# Altium PCB PriterPCB.PcbDoc
Units mm, origin at the board's own origin, x right, y up, seen from the top; angles counter-clockwise.
Board outline 149.73 x 79.12 mm, 2 copper layers (Top Layer, Bottom Layer); 63 components, 65 nets, 263 pads, 10 vias.
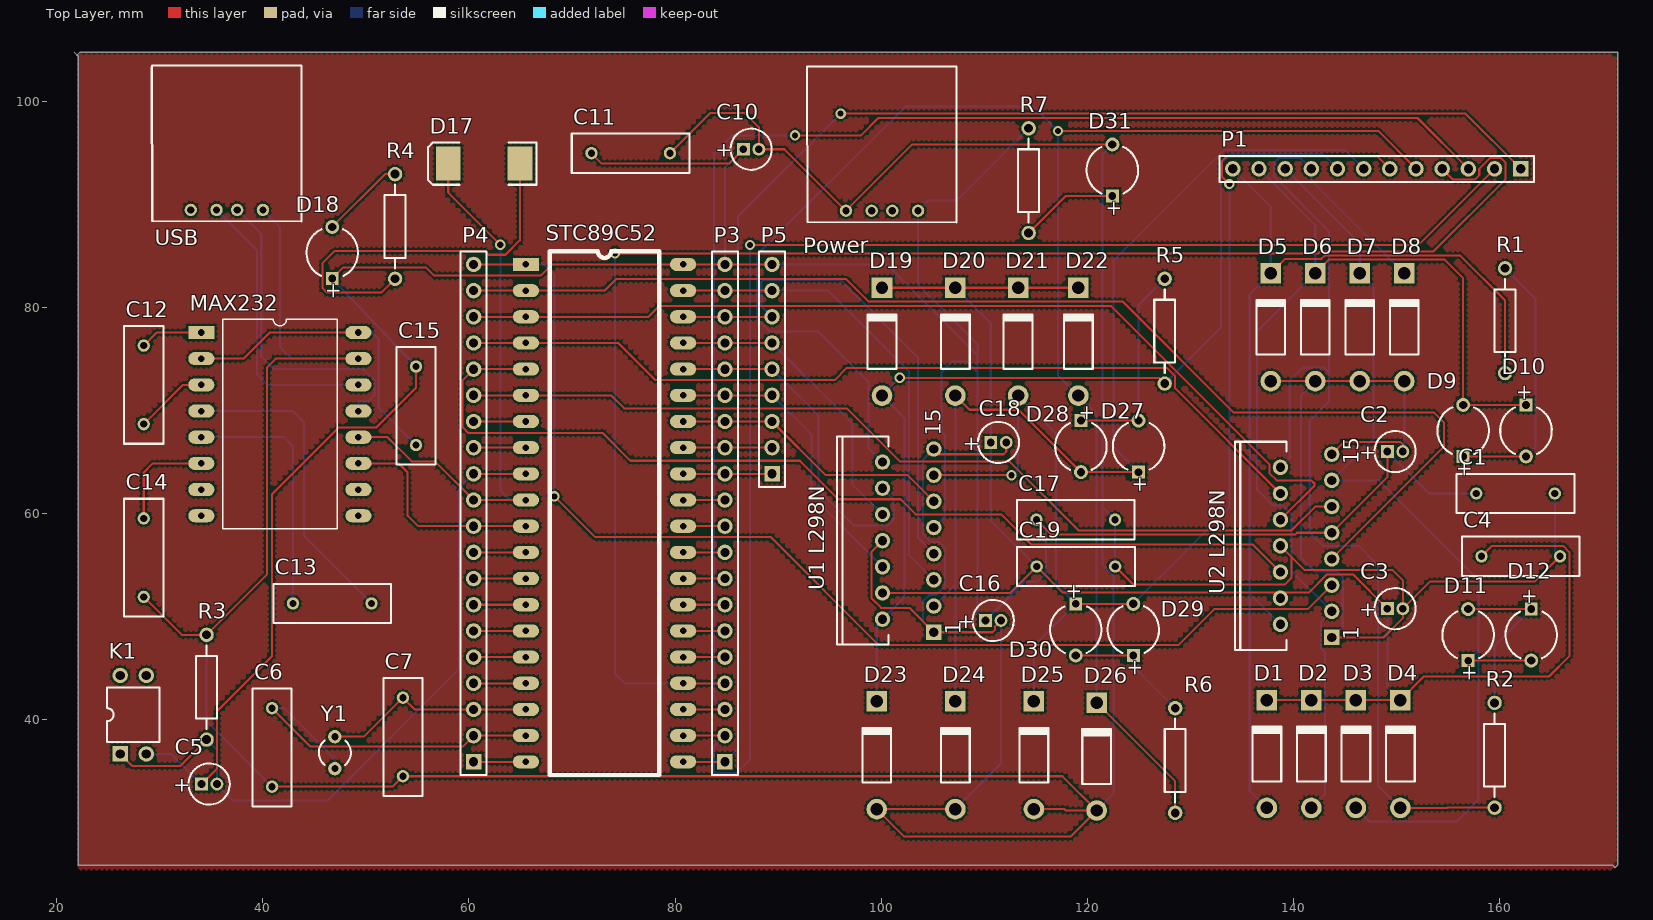
[diagram p0: Top Layer view]
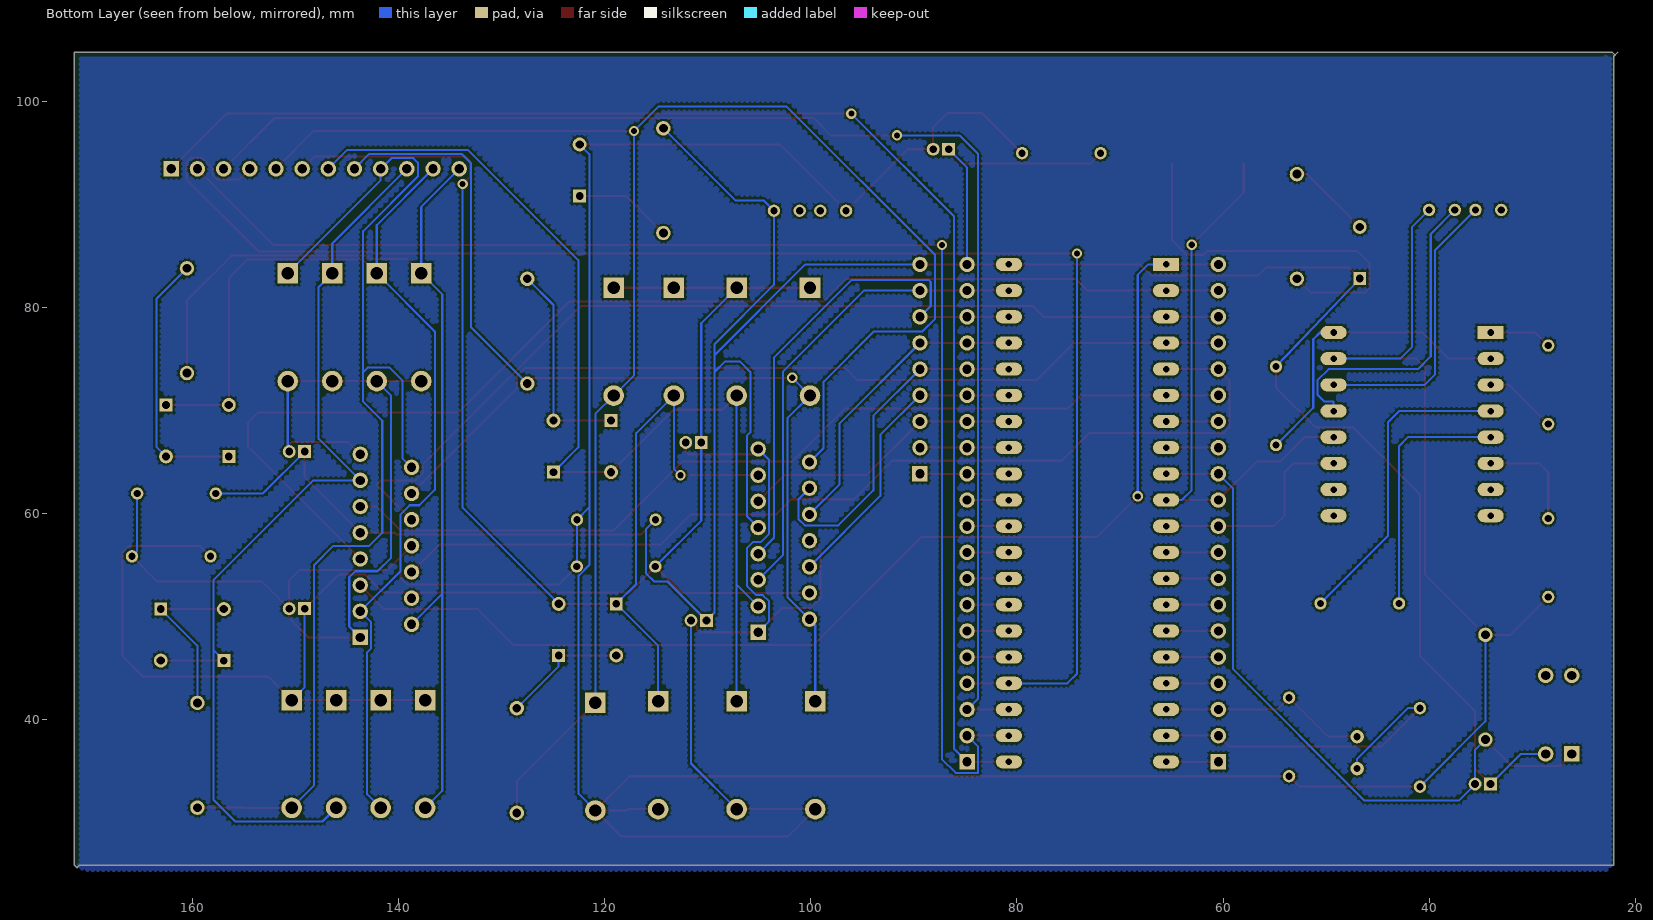
[diagram p1: Bottom Layer view, seen from below]

## Layer stack, top to bottom
Top Layer: signal copper 0.0356
Dielectric: dielectric 0.32, FR-4, Dk 4.8
Bottom Layer: signal copper 0.0356

## Board outline
21.971,104.521 22.225,104.775 171.45,104.775 171.45,25.908 171.196,25.654 170.942,25.908 22.098,25.908 22.098,104.394 21.717,104.775

## Design rules (kind name [scope] priority, off if disabled: settings)
Clearance [All] p1: gap=0.2
ComponentClearance ComponentClearance_1 [All] p2: gap=0.254 collisioncheckmode=3 verticalgap=0.254 showdistances=FALSE
DiffPairsRouting DiffPairsRouting_1 [All] p2: maxlimit=0.254 minlimit=0.254 mostfreqgap=0.254 maxuncoupledlength=12.7
FabricationTestPointUsage TestPointUsage [All] p1: valid=0 allowmultiple=FALSE
FabricationTestPointUsage TestPointUsage_1 [All] p2: valid=0 allowmultiple=FALSE
FabricationTestpoint Testpoint [All] p1: side=3 testpointundercomponent=TRUE minsize=1.016 maxsize=2.54 preferedsize=1.524 minholesize=0 maxholesize=1.016 preferedholesize=0.813 testpointgrid=0.025 allowsidetop=TRUE allowsidebottom=TRUE usegrid=TRUE gridtolerance=0
FabricationTestpoint Testpoint_1 [All] p2: side=3 testpointundercomponent=TRUE minsize=1.016 maxsize=2.54 preferedsize=1.524 minholesize=0 maxholesize=1.016 preferedholesize=0.813 testpointgrid=0.025 allowsidetop=TRUE allowsidebottom=TRUE usegrid=TRUE gridtolerance=0
FanoutControl Fanout_LCC [IsLCC] p1: bgadir=Out bgaviamode=Centered fanoutstyle=Auto fanoutdirection=Alternating viagrid=0.025 // Fanout_LCC (Default Rule)
FanoutControl Fanout_BGA [IsBGA] p2: bgadir=Out bgaviamode=Centered fanoutstyle=Auto fanoutdirection=Alternating viagrid=0.025 // Fanout_BGA (Default Rule)
FanoutControl Fanout_Default [All] p4: bgadir=Out bgaviamode=Centered fanoutstyle=Auto fanoutdirection=Alternating viagrid=0.025 // Fanout_Default (Default Rule)
FanoutControl Fanout_Small [(CompPinCount < 5)] p5: bgadir=Out bgaviamode=Centered fanoutstyle=Auto fanoutdirection=OutThenIn viagrid=0.025 // Fanout_Small (Default Rule)
FanoutControl Fanout_BGA_1 [IsBGA] p6: bgadir=Out bgaviamode=Centered fanoutstyle=Auto fanoutdirection=Alternating viagrid=0.025 // Fanout_BGA (Default Rule)
FanoutControl Fanout_LCC_1 [IsLCC] p7: bgadir=Out bgaviamode=Centered fanoutstyle=Auto fanoutdirection=Alternating viagrid=0.025 // Fanout_LCC (Default Rule)
FanoutControl Fanout_SOIC_1 [IsSOIC] p8: bgadir=Out bgaviamode=Centered fanoutstyle=Auto fanoutdirection=Alternating viagrid=0.025 // Fanout_SOIC (Default Rule)
FanoutControl Fanout_Small_1 [(CompPinCount < 5)] p9: bgadir=Out bgaviamode=Centered fanoutstyle=Auto fanoutdirection=OutThenIn viagrid=0.025 // Fanout_Small (Default Rule)
FanoutControl Fanout_Default_1 [All] p10: bgadir=Out bgaviamode=Centered fanoutstyle=Auto fanoutdirection=Alternating viagrid=0.025 // Fanout_Default (Default Rule)
Height Height_1 [All] p2: minheight=0 maxheight=25.4 prefheight=12.7
HoleSize HoleSize_1 [All] p2: absolutevalues=TRUE maxlimit=2.54 minlimit=0.025 maxpercent=80.000 minpercent=20.000
LayerPairs LayerPairs_1 [All] p2: enforce=TRUE
PasteMaskExpansion PasteMaskExpansion_1 [All] p2: expansion=0
PlaneClearance PlaneClearance_1 [All] p2: clearance=0.508
PolygonConnect [All] p1: connectstyle=Relief reliefconductorwidth=0.254 reliefentries=4 polygonreliefangle="90 Angle"
PolygonConnect PolygonConnect_1 [All] p2: connectstyle=Relief reliefconductorwidth=0.254 reliefentries=4 polygonreliefangle="90 Angle"
RoomDefinition [InComponentClass('点阵打印机')] p1: confinementstyle=ConfineIn formatcopy=TRUE lockcomponents=FALSE outline 22.225,25.654 171.196,25.654 171.196,104.394 22.225,104.394
RoutingPriority RoutingPriority_1 [All] p2: routingpriority=0
RoutingTopology RoutingTopology_1 [All] p2: topology=Shortest
RoutingVias [All] p1: holewidth=0.6 width=1 viastyle="Through Hole" minholewidth=0.711 minwidth=1.27 maxholewidth=0.711 maxwidth=1.27
SMDNeckDown [All] p1: percent=50.000
ShortCircuit ShortCircuit_1 [All] p2: allowed=FALSE
SilkscreenOverComponentPads SilkToSolderMaskClearance [IsPad] p1: minsilkscreentomaskgap=0.254
SolderMaskExpansion [All] p1: expansion=0.102
SolderMaskExpansion SolderMaskExpansion_1 [All] p2: expansion=0.102
UnRoutedNet UnRoutedNet_1 [All] p2:
Width [All] p1: maxlimit=0.2 minlimit=0.2 preferedwidth=0.2
21 further rules are at their usual default settings.

## Components (designator, comment, footprint, x,y, rotation, side; value= is the part's Value field where it differs from the comment)
C1 "Cap" RAD-0.3 161.544,61.976 r180 top
C2 "Cap Pol1" A 149.86,66.04 r0 top
C3 "Cap Pol1" A 149.86,50.8 r0 top
C4 "Cap" RAD-0.3 162.052,55.88 r180 top
C5 "Cap Pol1" A 34.798,33.782 r0 top
C6 "Cap" RAD-0.3 40.894,37.338 r90 top
C7 "Cap" RAD-0.3 53.594,38.354 r90 top
C10 "Cap Pol1" A 87.376,95.377 r0 top
C11 "Cap" RAD-0.3 75.692,94.996 r180 top
C12 "Cap" RAD-0.3 28.448,72.517 r90 top
C13 "Cap" RAD-0.3 46.736,51.308 r180 top
C14 "Cap" RAD-0.3 28.448,55.753 r90 top
C15 "Cap" RAD-0.3 54.864,70.485 r90 top
C16 "Cap Pol1" A 110.871,49.657 r0 top
C17 "Cap" RAD-0.3 118.872,59.436 r180 top
C18 "Cap Pol1" A 111.379,66.929 r0 top
C19 "Cap" RAD-0.3 118.893,54.894 r180 top
D1 "1N4007" DO-41 137.414,36.703 r90 top
D2 "1N4007" DO-41 141.732,36.703 r90 top
D3 "1N4007" DO-41 146.05,36.703 r90 top
D4 "1N4007" DO-41 150.368,36.703 r90 top
D5 "1N4007" DO-41 137.795,78.105 r90 top
D6 "1N4007" DO-41 142.113,78.105 r90 top
D7 "1N4007" DO-41 146.431,78.105 r90 top
D8 "1N4007" DO-41 150.749,78.105 r90 top
D9 "LED0" CAPPR5-5x5 156.464,68.072 r90 top
D10 "LED0" CAPPR5-5x5 162.56,68.072 r270 top
D11 "LED0" CAPPR5-5x5 156.947,48.26 r90 top
D12 "LED0" CAPPR5-5x5 163.068,48.26 r270 top
D17 "SS14" SMC 61.468,93.98 r180 top
D18 "LED0" CAPPR5-5x5 46.736,85.344 r90 top
D19 "1N4007" DO-41 100.076,76.708 r90 top
D20 "1N4007" DO-41 107.188,76.708 r90 top
D21 "1N4007" DO-41 113.284,76.708 r90 top
D22 "1N4007" DO-41 119.126,76.708 r90 top
D23 "1N4007" DO-41 99.568,36.576 r90 top
D24 "1N4007" DO-41 107.188,36.576 r90 top
D25 "1N4007" DO-41 114.808,36.576 r90 top
D26 "1N4007" DO-41 120.904,36.449 r90 top
D27 "LED0" CAPPR5-5x5 124.968,66.548 r90 top
D28 "LED0" CAPPR5-5x5 119.38,66.548 r270 top
D29 "LED0" CAPPR5-5x5 124.46,48.768 r90 top
D30 "LED0" CAPPR5-5x5 118.872,48.768 r270 top
D31 "LED0" CAPPR5-5x5 122.428,93.345 r90 top
K1 "SW-PB" DIP-4 27.432,40.513 r0 top (schematic designator S1)
MAX232 "MAX232CPE" MAX232CPE 34.036,77.597 r0 top (schematic designator U4)
P1 "Header 12" HDR1X12 162.052,93.472 r180 top
P3 "Header 20" HDR1X20 84.836,35.941 r90 top
P4 "Header 20" HDR1X20 60.452,35.941 r90 top
P5 "10k" HDR1X9 89.408,63.881 r90 top
Power "USBPower" USB 100.076,89.408 r0 top (schematic designator P9)
R1 "Res2" AXIAL-0.4 160.528,78.74 r90 top
R2 "Res2" AXIAL-0.4 159.512,36.576 r90 top
R3 "Res2" AXIAL-0.4 34.544,43.18 r90 top
R4 "Res2" AXIAL-0.4 52.832,87.884 r90 top
R5 "Res2" AXIAL-0.4 127.508,77.724 r90 top
R6 "Res2" AXIAL-0.4 128.524,36.068 r90 top
R7 "Res2" AXIAL-0.4 114.3,92.329 r90 top
STC89C52 "STC89C52" STC89C52 65.532,84.201 r0 top (schematic designator U1)
"U1 L298N" "L298N" MULTIWATT15VA 102.616,57.404 r90 top (schematic designator U3)
"U2 L298N" "L298N" MULTIWATT15VA 141.224,56.896 r90 top (schematic designator U2)
USB "USB" USB 36.51,89.49 r0 top (schematic designator P6)
Y1 "XTAL" R38 46.99,36.83 r0 top

## Footprints (in the part's own frame and the unit in brackets; to place one, negate y for a bottom-side part, rotate by r counter-clockwise, add the part's x,y. Pads: shape width x height; smd on the part's side, far side on the other; paste and mask are expansions set on the pad)
A [mm] "Capacitor, Electrolytic, Radial; Body 4 x 5 mm (Dia.xH typ); Pin Spacing 1.5 mm (typ)"
  rect 1.25x1.25 hole 0.75: 1(-0.75,0)
  round 1.25 hole 0.75: 2(0.75,0)
  silkscreen extent -2,-2 2,2
AXIAL-0.4 [mm] "Resistor; 2 Leads"
  round 1.4 hole 0.85: 1(-5.08,0) 2(5.08,0)
  silkscreen extent -4.06,-1.02 4.06,1.02
CAPPR5-5x5 [mm] "Capacitor, Electrolytic, Radial; Body 5 x 5 mm (Dia.xH typ); Pin Spacing 5 mm (typ)"
  rect 1.25x1.25 hole 0.75: 1(-2.5,0)
  round 1.35 hole 0.8: 2(2.5,0)
  silkscreen extent -2.26,-2.5 2.27,2.5
DIP-4 [mm] "DIP; 4 Leads; Row Spacing 7.62 mm; Pitch 2.54 mm"
  rect 1.5x1.5 hole 0.9: 1(-1.27,-3.81)
  round 1.5 hole 0.9: 2(1.27,-3.81) 3(1.27,3.81) 4(-1.27,3.81)
  silkscreen extent -2.55,-2.65 2.55,2.65
DO-41 [mm] "Diode, Axial; Body 5.2 x 2.7 mm (LxDia. max), Lead Dia. 0.86 mm (max)"
  round 2 hole 1.2: 1(-5.23,0)
  rect 2x2 hole 1.2: 2(5.23,0)
  silkscreen extent -2.65,-1.42 2.75,1.4
HDR1X9 [mm] "Connector; Header; 9 Position"
  rect 1.5x1.5 hole 0.9: 1(0,0)
  round 1.5 hole 0.9: 2(2.54,0) 3(5.08,0) 4(7.62,0) 5(10.16,0) 6(12.7,0) 7(15.24,0) 8(17.78,0) 9(20.32,0)
  silkscreen extent -1.27,-1.27 21.59,1.27
HDR1X12 [mm] "Connector; Header; 12 Position"
  rect 1.5x1.5 hole 0.9: 1(0,0)
  round 1.5 hole 0.9: 2(2.54,0) 3(5.08,0) 4(7.62,0) 5(10.16,0) 6(12.7,0) 7(15.24,0) 8(17.78,0) 9(20.32,0) 10(22.86,0) 11(25.4,0) 12(27.94,0)
  silkscreen extent -1.27,-1.27 29.21,1.27
HDR1X20 [mm] "Connector; Header; 20 Position"
  rect 1.5x1.5 hole 0.9: 1(0,0)
  round 1.5 hole 0.9: 2(2.54,0) 3(5.08,0) 4(7.62,0) 5(10.16,0) 6(12.7,0) 7(15.24,0) 8(17.78,0) 9(20.32,0) 10(22.86,0) 11(25.4,0) 12(27.94,0) 13(30.48,0) 14(33.02,0) 15(35.56,0) 16(38.1,0) 17(40.64,0) 18(43.18,0) 19(45.72,0) 20(48.26,0)
  silkscreen extent -1.27,-1.27 49.53,1.27
MAX232CPE [mm]
  rect 2.54x1.27 hole 0.635: 1(0,0)
  oval 2.54x1.27 hole 0.635: 2(0,-2.54) 3(0,-5.08) 4(0,-7.62) 5(0,-10.16) 6(0,-12.7) 7(0,-15.24) 8(0,-17.78) 9(15.24,-17.78) 10(15.24,-15.24) 11(15.24,-12.7) 12(15.24,-10.16) 13(15.24,-7.62) 14(15.24,-5.08) 15(15.24,-2.54) 16(15.24,0)
  silkscreen extent 2.06,-19.05 13.18,1.27
MULTIWATT15VA [mm] "TO, Thru-Hole, Vertical, Heatsink Mounted; 15 Bent Staggered Leads; Pitch 1.27 mm"
  rect 1.5x1.5 hole 0.9: 1(-8.89,-2.49)
  round 1.5 hole 0.9: 2(-7.62,2.49) 3(-6.35,-2.49) 4(-5.08,2.49) 5(-3.81,-2.49) 6(-2.54,2.49) 7(-1.27,-2.49) 8(0,2.49) 9(1.27,-2.49) 10(2.54,2.49) 11(3.81,-2.49) 12(5.08,2.49) 13(6.35,-2.49) 14(7.62,2.49) 15(8.89,-2.49)
  silkscreen extent -10.1,1.89 10.1,6.89
R38 [mm] "Crystal, Thru-Hole; 2 Leads; Body 3.1 x 8.2 mm (Dia.xH)"
  round 1.3 hole 0.7: 1(0,1.55) 2(0,-1.55)
  silkscreen extent -1.55,-1.19 1.55,1.17
RAD-0.3 [mm] "Capacitor; 2 Leads"
  round 1.2 hole 0.7: 1(-3.81,0) 2(3.81,0)
  silkscreen extent -5.71,-1.91 5.71,1.91
SMC [mm] "DO-214-AB/SMC; 2 C-Bend Leads; Body 7.9 x 5.9 mm, inc. leads (LxW)"
  rect 2.4x3.3 smd: 1(-3.475,0) 2(3.475,0)
  silkscreen extent -5.08,-2.05 5.42,2.06
STC89C52 [mm]
  rect 2.54x1.27 hole 0.635: 1(0,0)
  oval 2.54x1.27 hole 0.635: 2(0,-2.54) 3(0,-5.08) 4(0,-7.62) 5(0,-10.16) 6(0,-12.7) 7(0,-15.24) 8(0,-17.78) 9(0,-20.32) 10(0,-22.86) 11(0,-25.4) 12(0,-27.94) 13(0,-30.48) 14(0,-33.02) 15(0,-35.56) 16(0,-38.1) 17(0,-40.64) 18(0,-43.18) 19(0,-45.72) 20(0,-48.26) 21(15.24,-48.26) 22(15.24,-45.72) 23(15.24,-43.18) 24(15.24,-40.64) 25(15.24,-38.1) 26(15.24,-35.56) 27(15.24,-33.02) 28(15.24,-30.48) 29(15.24,-27.94) 30(15.24,-25.4) 31(15.24,-22.86) 32(15.24,-20.32) 33(15.24,-17.78) 34(15.24,-15.24) 35(15.24,-12.7) 36(15.24,-10.16) 37(15.24,-7.62) 38(15.24,-5.08) 39(15.24,-2.54) 40(15.24,0)
  silkscreen extent 2.31,-49.53 12.93,1.27
USB [mm]
  round 1.2 hole 0.7: 1(-3.5,0) 2(-1,0) 3(1,0) 4(3.5,0)
  silkscreen extent -7.28,-1.14 7.25,14

## Part data
C1 C4 C6 C7 C11 C12 C13 C14 C15 C17 C19: "Capacitor"
C2 C3 C5 C10 C16 C18: "Polarized Capacitor (Radial)"
D1 D2 D3 D4 D5 D6 D7 D8 D19 D20 D21 D22 D23 D24 D25 D26: library part "Diode 1N4007", "1 Amp General Purpose Rectifier"
D9 D10 D11 D12 D18 D27 D28 D29 D30 D31: "Typical INFRARED GaAs LED"
D17: library part Diode, "Default Diode"
K1: "Switch"
P1: library part "Header 2", "Header, 2-Pin"
P3 P4: "Header, 20-Pin"
P5: library part "Header 9", "Header, 9-Pin"
Power USB: library part "Header 4", "Header, 4-Pin"
R1 R2 R3 R4 R5 R6 R7: "Resistor"
"U1 L298N" "U2 L298N": "High-Current Switching Regulator"
Y1: "Crystal Oscillator"

## Via types
v1: diameter 1, hole 0.6, Top Layer to Bottom Layer, 10 vias

## Nets (pads, with @x,y where several pads share a name; then routed paths per layer and width w, separated by ;. In a path a pad name is that pad's centre, name@x,y a point inside that pad or via, vN(x,y) a via of type N, cw(c..) or ccw(c..) an arc to the next point about the centre after c; other vN are vias at no path point)
+5V: "U1 L298N.9" "U2 L298N.9" C1.2 C2.1 C5.1 C10.1 C11.2 C15.2 C16.1 C17.2 D18.1 K1.2 P3.20 P5.9 Power.4 R7.2 STC89C52.40 | length 304.4
  Top Layer w0.2: C5.1 35.56,35.294 35.56,40.869 40.894,46.203 40.894,61.9 47.371,68.377 51.003,68.377 54.864,72.238 C15.2 ; D18.1 47.814,83.922 55.804,83.922 56.617,83.109 66.98,83.109 68.072,84.201 STC89C52.40 P3.20 P5.9 ; C11.2 72.898,93.98 85.229,93.98 C10.1 ; C17.2 116.512,57.986 140.184,57.986 140.364,58.166 143.714,58.166 149.11,63.562 C2.1
  Bottom Layer w0.2: K1.2 31.127,36.703 C5.1 ; D18.1 46.736,82.804 C15.2 ; P3.20 84.836,93.587 C10.1 ; P5.9 100.533,84.201 109.347,75.387 ; 105.106,58.674 106.172,59.74 106.172,67.615 105.867,67.92 105.867,73.762 106.909,74.803 108.306,74.803 109.347,73.762 ; R7.2 107.315,90.424 104.592,90.424 Power.4 103.576,82.225 109.347,76.454 109.347,75.387 ; C17.2 116.002,58.496 116.002,54.254 115.189,53.442 113.906,53.442 C16.1 109.347,50.431 109.347,73.762 ; C2.1 153.174,61.976 C1.2 ; 109.347,73.762 109.347,75.387
ENA_1: "U2 L298N.6" P4.16 STC89C52.5 | length 96.3
  Top Layer w0.2: STC89C52.5 P4.16 59.385,72.974 59.385,68.402 59.944,67.843 72.974,67.843 75.667,65.151 92.1,65.151 95.834,61.417 101.879,61.417 103.353,59.944 111.633,59.944 114.554,57.023 136.067,57.023 138.734,54.356
ENB_1: "U2 L298N.11" P4.15 STC89C52.6 | length 89.7
  Top Layer w0.2: P4.15 STC89C52.6 73.787,71.501 75.057,70.231 96.672,70.231 101.829,65.075 112.471,65.075 119.16,58.386 139.776,58.386 142.096,60.706 143.714,60.706
GND: "U1 L298N.1" "U1 L298N.8" "U1 L298N.15" "U2 L298N.1" "U2 L298N.8" "U2 L298N.15" C1.1 C2.2 C3.2 C4.1 C6.1 C7.1 C10.2 C11.1 C14.1 C16.2 C17.1 C18.2 C19.1 D5.1 D6.1 D7.1 D8.1 D23.1 D24.1 D25.1 D26.1 D31.2 MAX232.15 Power.1 R3.2 USB.4 | length 525
  Top Layer w0.2: C14.1 32.131,48.26 R3.2 40.411,54.127 40.411,74.219 41.25,75.057 MAX232.15 ; C6.1 52.578,33.528 C7.1 117.579,34.544 D26.1 ; C11.1 83.388,98.882 86.766,98.882 88.126,97.523 C10.2 90.607,95.377 Power.1 103.013,95.845 D31.2 ; 100.126,57.404 99.06,56.338 99.06,51.816 100,50.876 102.744,50.876 105.106,48.514 110.795,48.514 111.049,48.768 111.049,49.085 C16.2 ; 105.106,66.294 104.598,65.786 105.106,65.786 111.875,65.786 112.129,66.04 C18.2 ; D24.1 D23.1 102.237,28.677 118.362,28.677 D26.1 ; D25.1 117.78,31.346 117.907,31.219 D26.1 ; C19.1 124.435,53.162 139.192,53.162 139.802,53.772 139.802,55.828 ; D5.1 D6.1 D7.1 D8.1 ; 138.734,56.896 139.802,55.828 ; 143.714,48.006 148.73,48.006 150.61,49.886 C3.2 ; 143.714,65.786 144.908,66.98 150.368,66.98 150.61,66.738 C2.2 ; C4.1 163.398,53.416 153.226,53.416 C3.2 ; 139.802,55.828 141.094,54.536 149.617,54.536 150.61,53.543 C3.2
  Bottom Layer w0.2: R3.2 34.544,39.878 C6.1 ; USB.4 41.656,87.844 41.656,76.2 42.799,75.057 MAX232.15 ; 105.106,48.514 104.038,49.582 104.038,51.511 104.648,52.121 105.308,52.121 106.172,52.984 106.172,56.693 105.613,57.252 104.851,57.252 104.038,58.064 104.038,65.226 105.106,66.294 ; D24.1 111.621,35.779 C16.2 ; D26.1 122.53,32.845 122.53,54 121.488,55.042 121.488,60.63 ; D31.2 121.488,94.905 121.488,60.63 ; C19.1 122.703,57.15 122.682,57.171 C17.1 121.488,60.63 ; D6.1 140.716,71.478 140.716,55.753 142.037,54.432 144.196,54.432 144.78,53.848 144.78,49.072 143.714,48.006 ; C2.2 150.749,66.179 D8.1 ; C1.1 165.354,56.388 C4.1
IN1_1: "U2 L298N.5" P4.20 STC89C52.1 | length 113.6
  Top Layer w0.2: P4.20 STC89C52.1 ; v1(68.275,61.697) 72.238,57.734 89.306,57.734 99.771,47.269 128.829,47.269 132.309,50.749 141.377,50.749 143.714,53.086
  Bottom Layer w0.2: STC89C52.1 67.259,84.201 68.275,83.185 v1(68.275,61.697)
IN2_1: "U2 L298N.7" P4.19 STC89C52.2 | length 118.1
  Top Layer w0.2: P4.19 STC89C52.2 73.152,81.661 74.27,82.779 96.596,82.779 98.755,80.62 123.413,80.62 134.208,69.825 153.645,69.825 154.584,68.885 154.584,66.496 143.714,55.626
IN3_1: "U2 L298N.10" P4.18 STC89C52.3 | length 94.5
  Top Layer w0.2: P4.18 STC89C52.3 77.419,79.121 78.486,80.188 122.276,80.188 137.668,64.795 137.668,63.957 138.379,63.246 141.732,63.246 142.037,62.941 142.037,62.739 138.734,59.436
IN4_1: "U2 L298N.12" P4.17 STC89C52.4 | length 86
  Top Layer w0.2: P4.17 STC89C52.4 74.498,76.581 78.105,72.974 95.479,72.974 96.672,74.168 127.711,74.168 128.524,73.355 128.524,72.186 138.734,61.976
NetC12_1: C12.1 MAX232.3 | length 7.2
  Top Layer w0.2: C12.1 32.258,72.517 MAX232.3
NetC12_2: C12.2 MAX232.1 | length 6.1
  Top Layer w0.2: C12.2 29.718,77.597 MAX232.1
NetC13_1: C13.1 MAX232.4 | length 30.7
  Bottom Layer w0.2: MAX232.4 42.901,69.977 43.993,68.885 43.993,57.861 C13.1
NetC13_2: C13.2 MAX232.5 | length 24.5
  Bottom Layer w0.2: MAX232.5 42.062,67.437 42.926,66.573 C13.2
NetC14_2: C14.2 MAX232.6 | length 10.4
  Top Layer w0.2: C14.2 28.448,64.008 29.337,64.897 MAX232.6
NetD9_1: D9.1 D10.2 R1.2 | length 26
  Top Layer w0.2: D9.1 D10.2
  Bottom Layer w0.2: R1.2 163.5,80.848 163.5,66.512 D10.2
NetD11_2: D11.2 D12.1 R2.2 | length 16.7
  Top Layer w0.2: D11.2 D12.1
  Bottom Layer w0.2: R2.2 159.512,47.204 D12.1
NetD17_1: D17.1 R4.1 | length 38
  Top Layer w0.2: R4.1 51.486,81.458 46.228,81.458 45.796,81.89 45.796,84.353 46.939,85.496 61.544,85.496 61.9,85.141 63.551,85.141 64.943,86.533 D17.1
NetD18_2: D18.2 R4.2 | length 8.2
  Top Layer w0.2: D18.2 51.856,92.964 R4.2
NetD27_2: D27.2 D28.1 R5.2 | length 20.4
  Top Layer w0.2: D28.1 D27.2
  Bottom Layer w0.2: D27.2 124.968,80.264 R5.2
NetD29_1: D29.1 D30.2 R6.2 | length 12.4
  Top Layer w0.2: D30.2 D29.1
  Bottom Layer w0.2: D29.1 124.46,45.212 R6.2
NetD31_1: D31.1 R7.1 | length 9.6
  Top Layer w0.2: R7.1 117.896,90.845 D31.1
NetP3_10: P3.11 STC89C52.31 | length 4.1
  Top Layer w0.2: STC89C52.31 P3.11
NetP3_11: P3.10 STC89C52.30 | length 4.1
  Top Layer w0.2: STC89C52.30 P3.10
NetP3_12: P3.9 STC89C52.29 | length 4.1
  Top Layer w0.2: STC89C52.29 P3.9
NetP3_13: P3.8 STC89C52.28 | length 4.1
  Top Layer w0.2: STC89C52.28 P3.8
NetP3_14: P3.7 STC89C52.27 | length 4.1
  Top Layer w0.2: STC89C52.27 P3.7
NetP3_15: P3.6 STC89C52.26 | length 4.1
  Top Layer w0.2: STC89C52.26 P3.6
NetP3_16: P3.5 STC89C52.25 | length 4.1
  Top Layer w0.2: STC89C52.25 P3.5
NetP4_1: P4.1 STC89C52.20 | length 5.1
  Top Layer w0.2: P4.1 STC89C52.20
NetP4_4: P4.4 STC89C52.17 | length 5.1
  Top Layer w0.2: P4.4 STC89C52.17
NetP4_5: P4.5 STC89C52.16 | length 5.1
  Top Layer w0.2: P4.5 STC89C52.16
NetP4_6: P4.6 STC89C52.15 | length 5.1
  Top Layer w0.2: P4.6 STC89C52.15
NetP4_7: P4.7 STC89C52.14 | length 5.1
  Top Layer w0.2: P4.7 STC89C52.14
NetP4_8: P4.8 STC89C52.13 | length 5.1
  Top Layer w0.2: P4.8 STC89C52.13
NetP4_9: P4.9 STC89C52.12 | length 5.1
  Top Layer w0.2: P4.9 STC89C52.12
NetP4_13: P4.13 STC89C52.8 | length 5.1
  Top Layer w0.2: P4.13 STC89C52.8
NetP4_14: P4.14 STC89C52.7 | length 5.1
  Top Layer w0.2: P4.14 STC89C52.7
"OUTA 1": "U2 L298N.2" D1.1 D5.2 P1.12 R1.1 | length 101.6
  Top Layer w0.2: D5.2 139.194,84.734 142.704,84.734 143.027,85.058 156.191,85.058 160.528,80.721 R1.1
  Bottom Layer w0.2: P1.12 137.795,89.789 D5.2 135.76,81.3 135.76,52.25 ; D1.1 135.76,33.127 135.76,52.25 ; 138.734,49.276 135.76,52.25
"OUTA 2": "U2 L298N.3" D2.1 D6.2 D9.2 D10.1 P1.11 | length 105.3
  Top Layer w0.2: D6.2 143.436,84.658 154.661,84.658 156.464,82.855 D9.2 D10.1
  Bottom Layer w0.2: P1.11 142.113,88.011 D6.2 136.474,77.696 136.474,62.332 137.973,60.833 138.913,60.833 139.802,59.944 139.802,54.458 143.714,50.546 142.664,49.496 142.664,46.956 143.053,46.567 143.053,32.794 D2.1
"OUTA 3": "U2 L298N.13" D3.1 D7.2 D11.1 D12.2 P1.10 | length 95.8
  Top Layer w0.2: D11.1 D12.2
  Bottom Layer w0.2: P1.10 146.431,86.233 D7.2 147.752,82.014 147.752,67.284 143.714,63.246 148.285,63.246 157.937,53.594 157.937,46.751 ; D3.1 147.373,30.15 155.854,30.15 157.937,32.233 157.937,46.751 ; D11.1 157.937,46.751
"OUTA 4": "U2 L298N.14" D4.1 D8.2 P1.9 R2.1 | length 111.8
  Top Layer w0.2: D4.1 154.915,31.473 154.938,31.496 R2.1
  Bottom Layer w0.2: 138.734,64.516 139.624,65.406 139.624,72.949 140.868,74.193 143.002,74.193 143.434,73.762 ; D4.1 148.184,33.657 148.184,55.042 146.329,56.896 142.85,56.896 141.58,58.166 141.58,69.037 143.434,70.891 143.434,73.762 ; D8.2 141.732,92.352 P1.9 140.682,94.522 138.566,94.522 138.125,94.082 138.125,92.735 143.434,87.427 143.434,73.762
"OUTB 1": "U1 L298N.2" D19.1 D23.2 P1.8 R5.1 | length 96
  Top Layer w0.2: v1(101.803,73.203) 126.949,73.203 R5.1
  Bottom Layer w0.2: D23.2 99.568,49.226 100.126,49.784 102.275,51.933 102.275,69.279 D19.1 101.801,73.203 v1(101.803,73.203) ; R5.1 132.969,78.105 132.969,94.005 133.886,94.922 142.822,94.922 P1.8
"OUTB 2": "U1 L298N.3" D20.1 D24.2 D27.1 D28.2 P1.7 | length 104.5
  Top Layer w0.2: D20.1 108.562,70.104 113.324,70.104 D28.2 D27.1
  Bottom Layer w0.2: 105.106,51.054 107.188,53.136 ; D24.2 107.188,53.136 ; D20.1 107.188,53.136 ; D27.1 122.552,66.464 122.552,84.604 133.27,95.322 144.962,95.322 P1.7
"OUTB 3": "U1 L298N.13" D21.1 D25.2 D29.2 D30.1 P1.6 | length 118.9
  Top Layer w0.2: 105.106,63.754 v1(112.649,63.754) ; D30.1 D29.2 ; v1(133.782,91.999) 133.045,92.735 133.045,94.209 133.502,94.666 148.158,94.666 P1.6
  Bottom Layer w0.2: v1(112.649,63.754) 113.284,64.389 D21.1 116.942,67.82 116.942,53.198 D30.1 114.808,47.204 D25.2 ; D29.2 133.782,60.59 v1(133.782,91.999)
"OUTB 4": "U1 L298N.14" D22.1 D26.2 P1.5 R6.1 | length 171.2
  Top Layer w0.2: v1(117.145,97.155) 148.209,97.155 P1.5 ; D26.2 128.524,34.059 R6.1
  Bottom Layer w0.2: 100.126,65.024 98.755,66.395 98.755,72.822 93.878,77.699 89.179,77.699 87.935,78.943 87.935,85.115 102.362,99.543 114.757,99.543 v1(117.145,97.155) 117.145,73.459 D22.1 120.904,69.7 D26.2
P0.0: "U1 L298N.5" P3.19 P5.8 STC89C52.39 | length 46.4
  Top Layer w0.2: STC89C52.39 P3.19 P5.8
  Bottom Layer w0.2: P5.8 94.844,81.661 102.675,73.829 102.675,56.025 105.106,53.594
P0.1: "U1 L298N.7" P3.18 P5.7 STC89C52.38 | length 50.5
  Top Layer w0.2: STC89C52.38 P3.18 P5.7
  Bottom Layer w0.2: P5.7 88.358,80.171 88.358,82.499 88.57,82.711 96.029,82.711 103.585,75.155 103.585,57.655 105.106,56.134
P0.2: "U1 L298N.10" P3.17 P5.6 STC89C52.37 | length 29.7
  Top Layer w0.2: STC89C52.37 P3.17 P5.6
  Bottom Layer w0.2: P5.6 97.231,68.758 97.231,62.839 100.126,59.944
P0.3: "U1 L298N.12" P3.16 P5.5 STC89C52.36 | length 34.6
  Top Layer w0.2: STC89C52.36 P3.16 P5.5
  Bottom Layer w0.2: P5.5 93.929,69.52 93.929,62.281 97.333,58.877 100.584,58.877 101.194,59.487 101.194,61.416 100.126,62.484
P0.4: "U1 L298N.6" P3.15 P5.4 STC89C52.35 | length 29.7
  Top Layer w0.2: STC89C52.35 P3.15 P5.4
  Bottom Layer w0.2: P5.4 93.243,67.666 93.243,61.747 100.126,54.864
P0.5: "U1 L298N.11" P3.14 P5.3 STC89C52.34 | length 27.5
  Top Layer w0.2: STC89C52.34 P3.14 P5.3 94.615,63.754 102.566,63.754 105.106,61.214
P0.6: P3.13 P5.2 STC89C52.33 | length 8.6
  Top Layer w0.2: STC89C52.33 P3.13 P5.2
P0.7: P3.12 P5.1 STC89C52.32 | length 8.6
  Top Layer w0.2: STC89C52.32 P3.12 P5.1
P2.0: P1.1 P3.1 STC89C52.21 | length 139.8
  Top Layer w0.2: STC89C52.21 P3.1 ; v1(96.063,98.831) 156.693,98.831 P1.1
  Bottom Layer w0.2: P3.1 86.106,37.211 86.106,88.875 v1(96.063,98.831)
P2.1: P1.2 P3.2 STC89C52.22 | length 137.3
  Top Layer w0.2: STC89C52.22 P3.2 ; v1(87.274,86.081) 152.121,86.081 P1.2
  Bottom Layer w0.2: P3.2 83.769,37.414 83.769,34.874 85.954,34.874 87.274,36.195 v1(87.274,86.081)
P2.2: P1.3 P3.3 STC89C52.23 | length 135.1
  Top Layer w0.2: STC89C52.23 P3.3 ; v1(91.643,96.723) 98.044,96.723 99.73,98.409 152.035,98.409 P1.3
  Bottom Layer w0.2: P3.3 83.769,42.088 83.769,94.92 85.573,96.723 v1(91.643,96.723)
P2.3: P1.4 P3.4 STC89C52.24 | length 150.8
  Top Layer w0.2: v1(74.168,85.268) 142.425,85.268 142.615,85.458 153.581,85.458 160.579,92.456 160.579,94.082 160.122,94.539 159.089,94.539 158.022,93.472 158.022,92.862 157.582,92.422 155.482,92.422 P1.4 ; STC89C52.24 P3.4
  Bottom Layer w0.2: v1(74.168,85.268) 74.168,44.501 75.108,43.561 STC89C52.24
RST: C5.2 K1.1 P4.12 R3.1 STC89C52.9 | length 68.7
  Top Layer w0.2: K1.1 27.33,35.535 31.979,35.535 R3.1 ; P4.12 STC89C52.9
  Bottom Layer w0.2: R3.1 35.548,37.096 C5.2 37.148,32.182 46.279,32.182 59.055,44.958 59.055,62.484 P4.12
RX: D17.2 MAX232.12 P4.11 STC89C52.10 | length 55.4
  Top Layer w0.2: MAX232.12 52.095,67.437 54.432,65.1 56.693,65.1 P4.11 STC89C52.10 ; D17.2 57.993,91.161 v1(63.043,86.111)
  Bottom Layer w0.2: v1(63.043,86.111) 63.043,62.306 64.008,61.341 STC89C52.10
"RX IN": MAX232.13 USB.3 | length 31.3
  Bottom Layer w0.2: USB.3 39.85,87.15 39.85,75.278 41.087,74.041 49.754,74.041 50.846,72.949 50.846,71.577 50.16,70.891 49.276,70.891 MAX232.13
TX: MAX232.11 P4.10 STC89C52.11 | length 21.2
  Top Layer w0.2: MAX232.11 53.162,64.897 54.051,64.008 54.051,59.817 55.067,58.801 P4.10 STC89C52.11
"TX OUT": MAX232.14 USB.2 | length 27.9
  Bottom Layer w0.2: USB.2 39.446,85.554 39.446,73.508 40.437,72.517 MAX232.14
V+: C15.1 MAX232.2 MAX232.16 | length 30.3
  Top Layer w0.2: MAX232.2 38.125,75.057 40.665,77.597 MAX232.16
  Bottom Layer w0.2: MAX232.16 50.597,77.597 51.246,76.948 51.246,70.293 C15.1
VCC: "U1 L298N.4" "U2 L298N.4" C3.1 C4.2 C18.1 C19.2 D1.2 D2.2 D3.2 D4.2 D19.2 D20.2 D21.2 D22.2 | length 163.2
  Top Layer w0.2: D19.2 100.078,81.94 107.186,81.94 D20.2 D21.2 D22.2 ; 100.126,52.324 112.513,52.324 C19.2 117.627,52.349 138.201,52.349 ; D1.2 D2.2 D3.2 D4.2 152.656,44.221 164.795,44.221 166.776,46.203 166.776,56.286 166.167,56.896 159.258,56.896 C4.2 ; 138.734,51.816 138.201,52.349 ; C3.1 145.774,54.136 143.256,54.136 141.469,52.349 138.734,52.349 138.201,52.349
  Bottom Layer w0.2: D20.2 110.629,78.497 C18.1 110.629,59.348 C19.2 ; C3.1 149.11,43.191 D4.2
X1: C7.2 P4.3 STC89C52.18 Y1.1 | length 20.6
  Top Layer w0.2: Y1.1 49.81,38.38 C7.2 54.737,41.021 P4.3 STC89C52.18
X2: C6.2 P4.2 STC89C52.19 Y1.2 | length 35.7
  Top Layer w0.2: C6.2 44.628,37.414 59.385,37.414 P4.2 STC89C52.19
  Bottom Layer w0.2: C6.2 42.062,41.148 46.99,36.22 Y1.2
pads on no net: K1.3 K1.4 MAX232.7 MAX232.8 MAX232.9 MAX232.10 Power.2 Power.3 USB.1

## Polygon pours and split planes (outlines as drawn)
no net on Top Layer "Top Layer-No Net" (hatched 90Degree grid 0.508 track 0.508, pour order 2): 22.225,104.394 171.196,104.394 171.196,26.162 171.069,26.035 170.688,25.654 22.225,25.654 22.225,104.394
no net on Bottom Layer "Top Layer-No Net" (hatched 90Degree grid 0.508 track 0.508, pour order 4): 22.479,104.648 22.987,104.14 170.815,104.14 170.815,26.035 170.942,25.908 170.561,25.527 22.479,25.527 22.479,104.267 22.733,104.521

## Silkscreen, mask and mechanical layers (free items; w line width, h text height)
Mechanical 16:
  drawing of 1877 lines, arcs and shapes, not listed
  text "1" at 31.276,237.998 h1.78
  text "2" at 94.666,237.998 h1.78
  text "3" at 157.895,237.998 h1.78
  text "4" at 221.564,237.998 h1.78
  text "5" at 285.039,237.998 h1.78
  text "6" at 348.666,237.998 h1.78
  text "A" at 1.905,208.966 h1.78
  text "A" at 377.825,208.966 h1.78
  text "B" at 1.905,148.514 h1.78
  text "B" at 377.825,148.514 h1.78
  text "C" at 1.905,88.189 h1.78
  text "ENGINEER:" at 262.89,33.02 h1.14
  text "TITLE:" at 300.99,33.02 h1.14
  text "D" at 1.905,27.991 h1.78
  text "D" at 377.825,27.991 h1.78
  text "PCB DESIGNER:" at 262.89,25.527 h1.14
  text "DATE:" at 262.89,17.78 h1.14
  text "PART NO.:" at 300.99,17.78 h1.14
  text "REV:" at 354.33,17.78 h1.14
  text "Altium Limited" at 229.87,15.24 h1.78
  text ".PRINT_DATE" at 264.16,14.732 h1.78
  text "12a Rodborough Rd" at 229.87,12.7 h1.78
  text "Frenchs Forest" at 229.87,10.16 h1.78
  text "FILE NAME:" at 262.89,10.16 h1.14
  text "DWG NO:" at 300.99,10.16 h1.14
  text "SCALE:" at 354.33,10.16 h1.14
  text "NSW 2086" at 229.87,7.62 h1.78
  text ".PCB_FILE_NAME_NO_PATH" at 264.16,7.112 h1.78
  text "1" at 31.276,1.778 h1.78
  text "2" at 94.666,1.778 h1.78
  text "3" at 157.895,1.778 h1.78
  text "4" at 221.564,1.778 h1.78
  text "5" at 285.039,1.778 h1.78
  text "6" at 348.666,1.778 h1.78

## Text inside footprints (layer, text, board x,y; h text height)
C2: Top Overlay "+" at 146.385,65.29 h1.5
C3: Top Overlay "+" at 146.385,50.05 h1.5
C5: Top Overlay "+" at 31.323,33.032 h1.5
C10: Top Overlay "+" at 83.901,94.627 h1.5
C16: Top Overlay "+" at 107.396,48.907 h1.5
C18: Top Overlay "+" at 107.904,66.179 h1.5
D9: Top Overlay "+" at 157.214,63.522 h1.5 r90
D10: Top Overlay "+" at 161.81,72.622 h1.5 r270
D11: Top Overlay "+" at 157.697,43.71 h1.5 r90
D12: Top Overlay "+" at 162.318,52.81 h1.5 r270
D18: Top Overlay "+" at 47.486,80.794 h1.5 r90
D27: Top Overlay "+" at 125.718,61.998 h1.5 r90
D28: Top Overlay "+" at 119.38,70.612 h1.5 r270
D29: Top Overlay "+" at 125.21,44.218 h1.5 r90
D30: Top Overlay "+" at 118.122,53.318 h1.5 r270
D31: Top Overlay "+" at 123.178,88.795 h1.5 r90
"U1 L298N": Top Overlay "15" at 105.791,67.564 h1.5 r90; Top Overlay "1" at 107.731,48.284 h1.5 r90
"U2 L298N": Top Overlay "15" at 146.339,64.836 h1.5 r90; Top Overlay "1" at 146.339,47.776 h1.5 r90